# Altium PCB TRISECT_Leg.PcbDoc
Units mil, origin at the board's own origin, x right, y up, seen from the top; angles counter-clockwise.
Board outline 2500 x 1000 mil, 2 copper layers (Top Layer, Bottom Layer); 3 components, 19 nets, 22 pads, 0 vias.
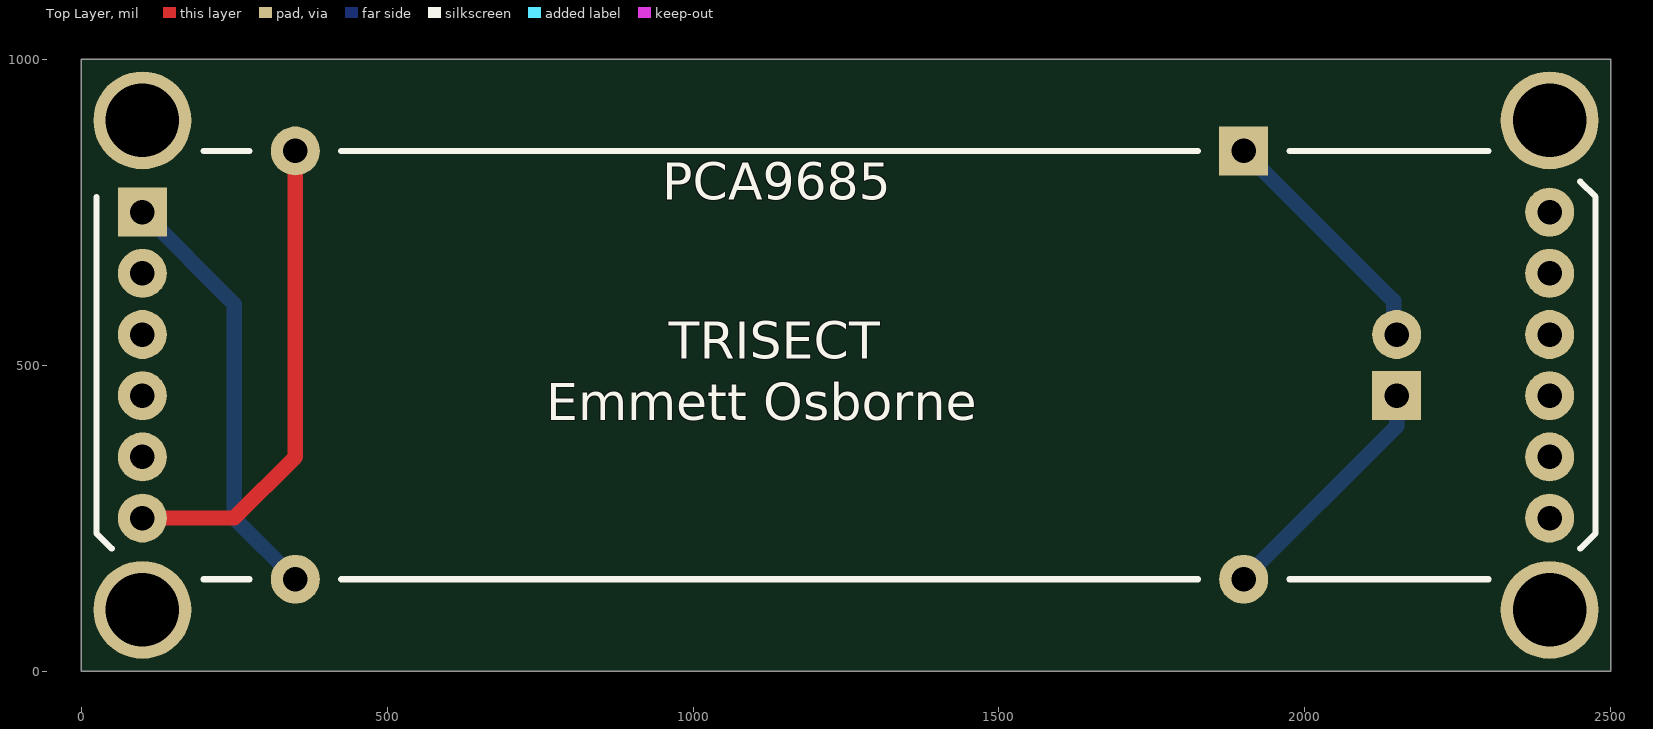
[diagram p0: Top Layer view]
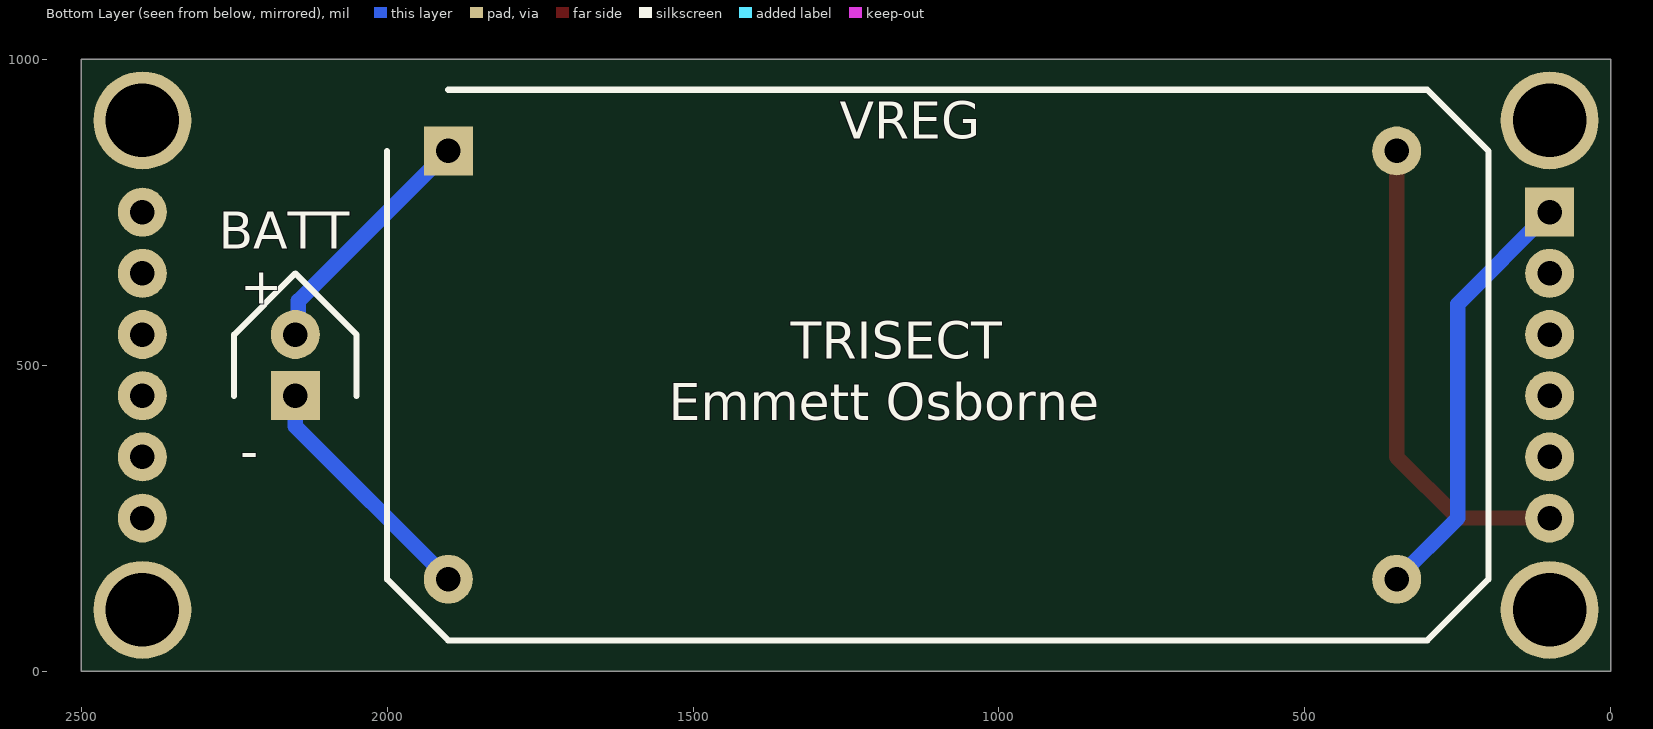
[diagram p1: Bottom Layer view, seen from below]

## Layer stack, top to bottom
Top Solder: solder mask 0.4, Solder Resist, Dk 3.5
Top Layer: signal copper 1.4
Dielectric 1: dielectric 12.6, FR-4, Dk 4.8
Bottom Layer: signal copper 1.4
Bottom Solder: solder mask 0.4, Solder Resist, Dk 3.5

## Board outline
0,0 0,1000 2500,1000 2500,0

## Design rules (kind name [scope] priority, off if disabled: settings)
Clearance [All] p1: gap=10 ignorepadtopadclearanceinfootprint=FALSE
HoleSize [All] p1: absolutevalues=TRUE maxlimit=120 minlimit=1 maxpercent=80.000 minpercent=20.000
PolygonConnect [All] p1: connectstyle=Relief reliefconductorwidth=10 reliefentries=4 polygonreliefangle="90 Angle" airgapwidth=10
RoutingVias [All] p1: holewidth=28 width=50 viastyle="Through Hole" minholewidth=28 minwidth=50 maxholewidth=28 maxwidth=50
SolderMaskExpansion [All] p1: expansion=4 istentingtop=FALSE
SupplyNets "Schematic Supply Nets" [InNet('GND')] p1: voltage=0.000
Width [All] p1: maxlimit=25 minlimit=10 preferedwidth=10 minimp=50.000000 maximp=50.000000 favimp=50.000000
29 further rules are at their usual default settings.

## Components (designator, comment, footprint, x,y, rotation, side; value= is the part's Value field where it differs from the comment)
BATT "2PCON" 2PCON 2150,550 r180 bottom (schematic designator 2P_2)
PCA9685 "PCA9685" PCA9685 100,750 r0 top (schematic designator PCA9685_1)
VREG "VREG" VREG 1900,850 r180 bottom (schematic designator VREG_2)

## Footprints (in the part's own frame and the unit in brackets; to place one, negate y for a bottom-side part, rotate by r counter-clockwise, add the part's x,y. Pads: shape width x height; smd on the part's side, far side on the other; paste and mask are expansions set on the pad)
2PCON [mil] "2 pin connector"
  rect 80x80 hole 40: 1(0,-100)
  round 80 hole 40: 2(0,0)
  silkscreen extent -100,-100 100,100
PCA9685 [mil] "PCA9685 pins & silk"
  rect 80x80 hole 40: 1(0,0)
  round 80 hole 40: 2(0,-100) 3(0,-200) 4(0,-300) 5(0,-400) 6(0,-500) 7(2300,0) 8(2300,-100) 9(2300,-200) 10(2300,-300) 11(2300,-400) 12(2300,-500)
  silkscreen extent -75,-600 2375,100
VREG [mil] "Voltage regulator"
  rect 80x80 hole 40: 1(0,0)
  round 80 hole 40: 2(0,-700) 3(1550,0) 4(1550,-700)
  silkscreen extent -100,-800 1700,100

## Part data
BATT: "2 pin connector"
PCA9685: "PCA9685 PWM Servo Driver"
VREG: "Voltage Regulator - basic pinout"

## Free pads (board coordinates)
  round 160 hole 120: 103(100,100) 103(100,900) 103(2400,100) 103(2400,900)

## Nets (pads, with @x,y where several pads share a name; then routed paths per layer and width w, separated by ;. In a path a pad name is that pad's centre, name@x,y a point inside that pad or via, vN(x,y) a via of type N, cw(c..) or ccw(c..) an arc to the next point about the centre after c; other vN are vias at no path point)
3V3: 
CE: 
CSN: 
GND: PCA9685.1 VREG.4 | length 703.6
  Bottom Layer w25: PCA9685.1 250,600 250,250 VREG.4
GND_IN: BATT.1 VREG.2 | length 403.6
  Bottom Layer w25: VREG.2 2150,400 BATT.1
L1C: 
L1D: 
L2C: 
L2D: 
L3C: 
L3D: 
MISO: 
MOSI: 
SCK: 
SCL: 
SDA: 
V+: PCA9685.6 VREG.3 | length 791.4
  Top Layer w25: PCA9685.6 250,250 350,350 VREG.3
VIN: 
VIN_IN: BATT.2 VREG.1 | length 403.6
  Bottom Layer w10: BATT.2@2145,555 BATT.2
  Bottom Layer w25: VREG.1 2145,605 BATT.2@2145,555
pads on no net: PCA9685.2 PCA9685.3 PCA9685.4 PCA9685.5 PCA9685.7 PCA9685.8 PCA9685.9 PCA9685.10 PCA9685.11 PCA9685.12

## Silkscreen, mask and mechanical layers (free items; w line width, h text height)
Top Overlay:
  text "TRISECT" at 960,510 h60
  text "Emmett Osborne" at 760,410 h60
Bottom Overlay:
  text "TRISECT" at 1340,510 h60
  text "Emmett Osborne" at 1540,410 h60

## Text inside footprints (layer, text, board x,y; h text height)
BATT: Bottom Overlay "+" at 2240,600 h60; Bottom Overlay "-" at 2240,330.01 h60